# Altium PCB SmartEnergyMeter_PCB.PcbDoc
Units mm, origin at the board's own origin, x right, y up, seen from the top; angles counter-clockwise.
Board outline 92.25 x 74.75 mm, 2 copper layers (Top Layer, Bottom Layer); 31 components, 20 nets, 103 pads, 12 vias.
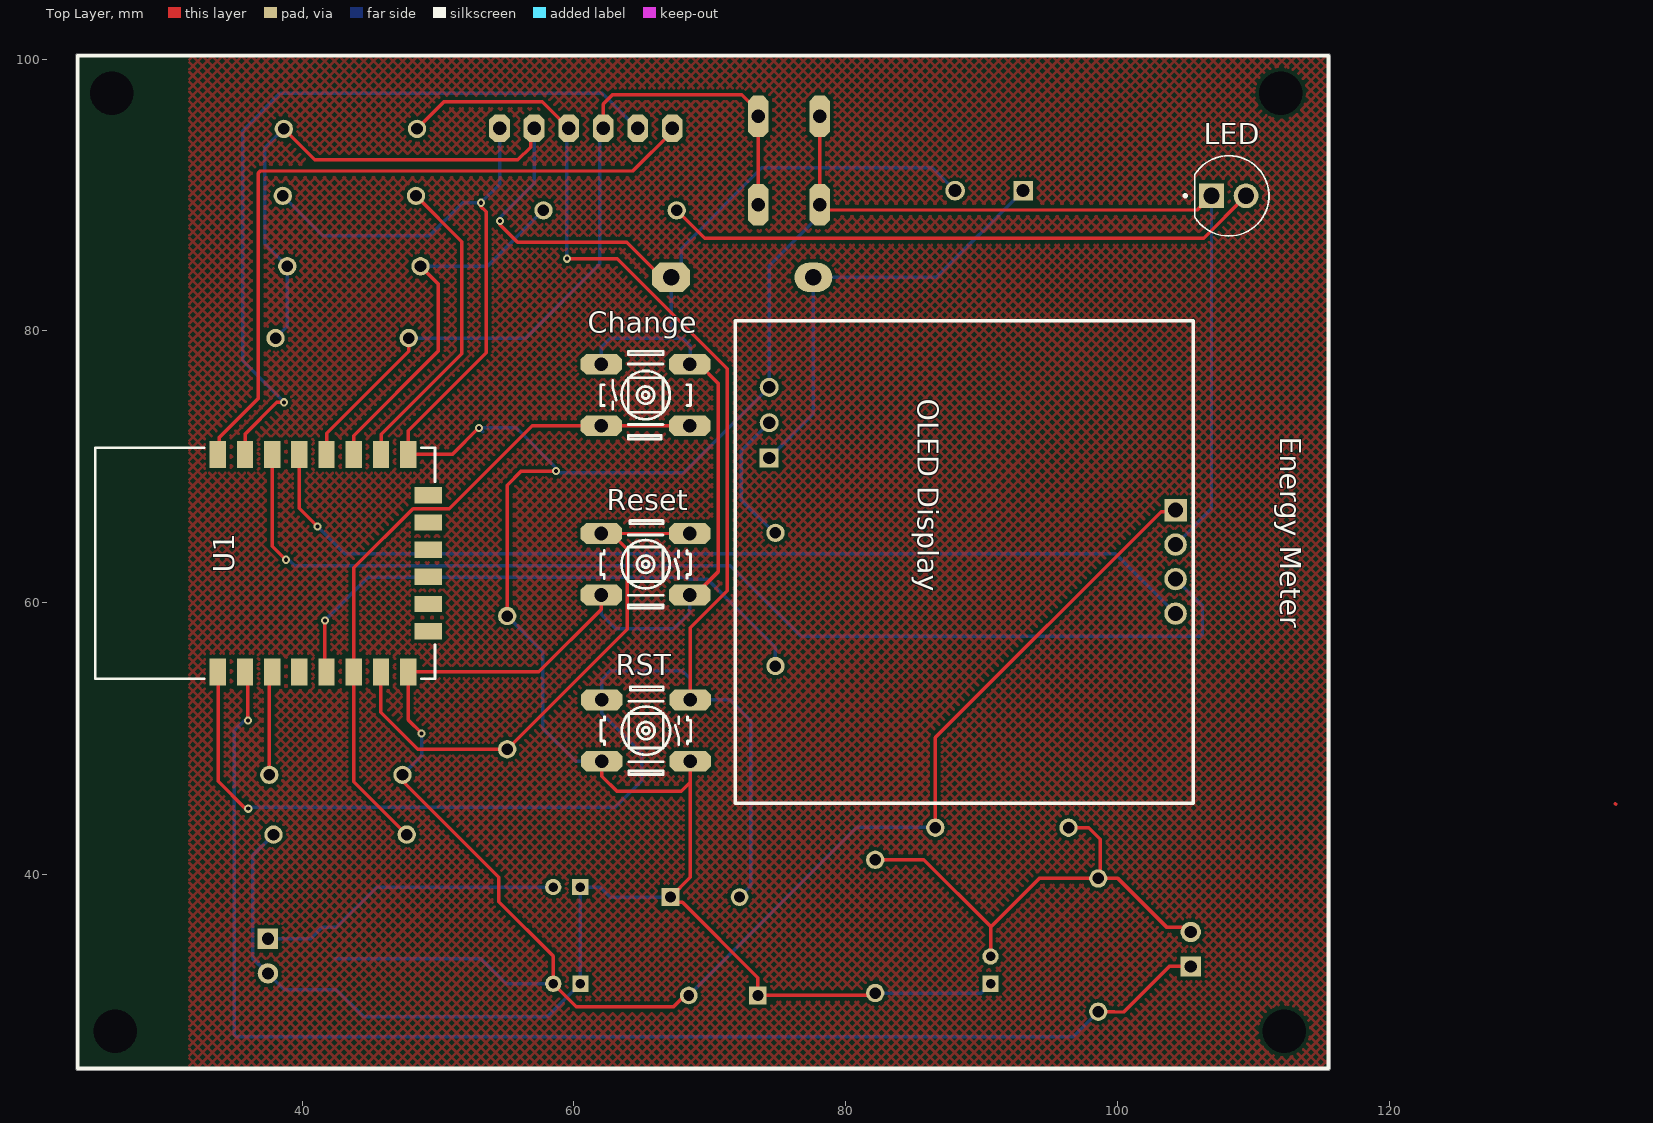
[diagram p0: Top Layer view]
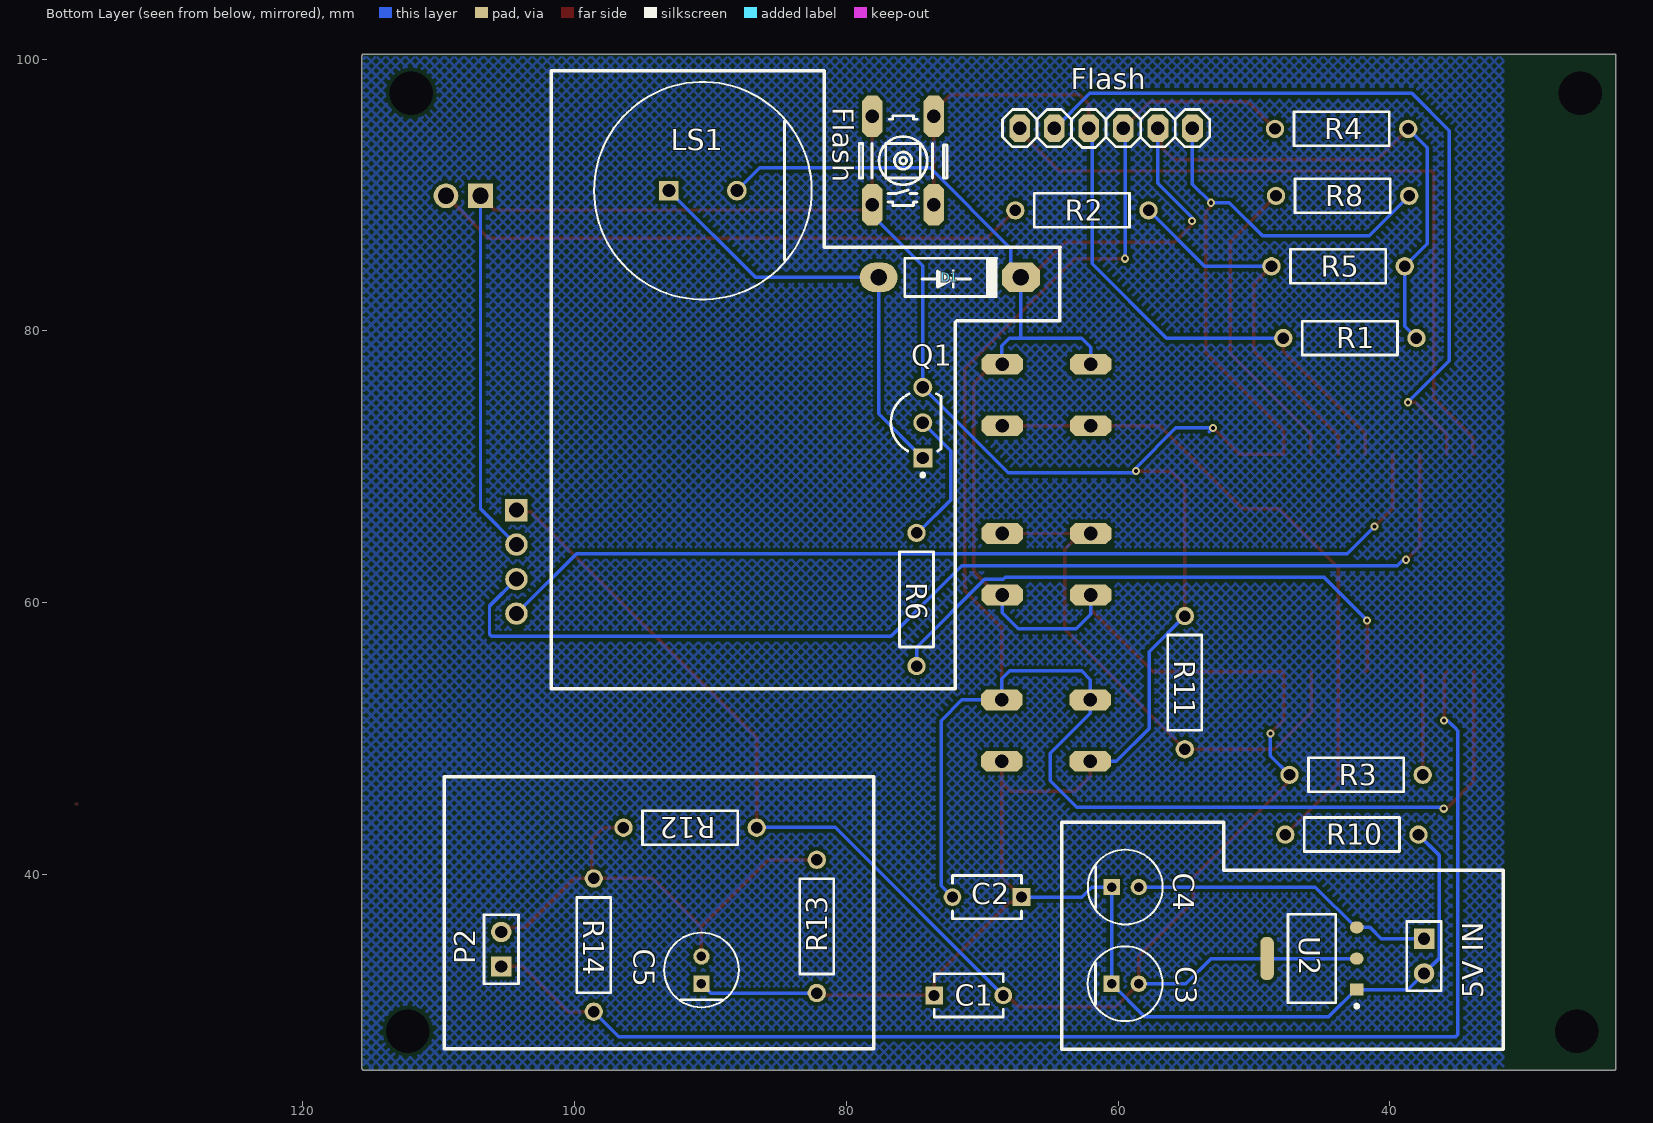
[diagram p1: Bottom Layer view, seen from below]
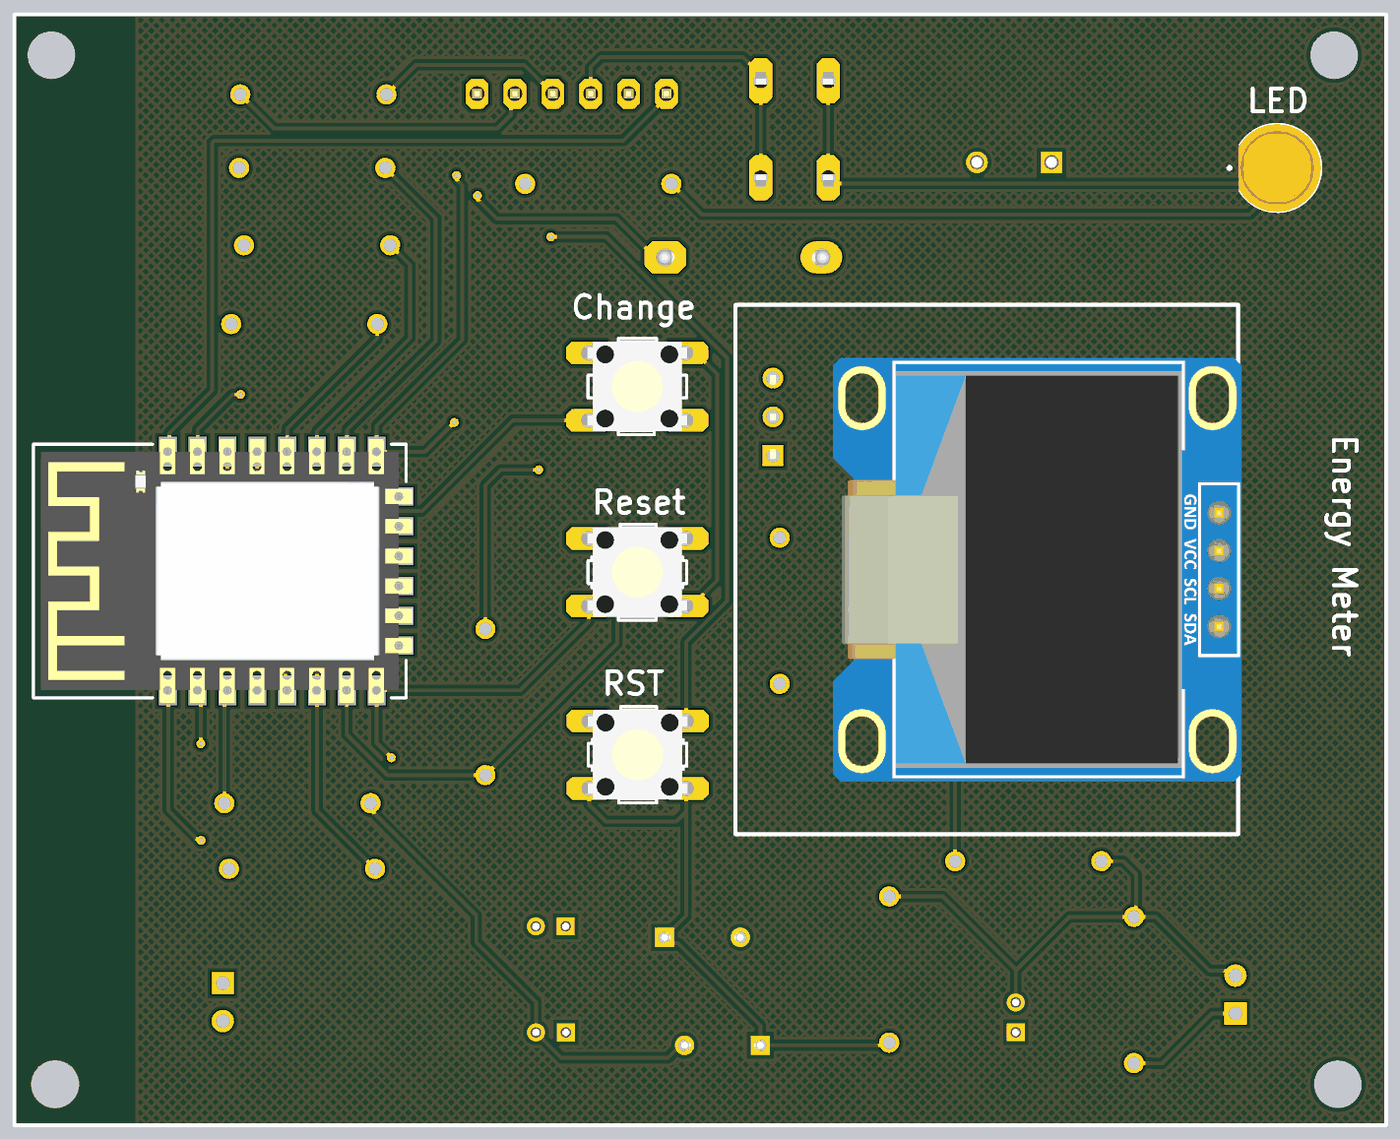
[diagram p2: 3D render of the assembled board from above, using the file's embedded part models]

## Layer stack, top to bottom
Top Solder: solder mask 0.0102, Solder Resist, Dk 3.5
Top Layer: signal copper 0.0356
Dielectric 1: dielectric 0.32, FR-4, Dk 4.8
Bottom Layer: signal copper 0.0356
Bottom Solder: solder mask 0.0102, Solder Resist, Dk 3.5

## Board outline
23.373,25.75 23.373,100.25 cw(c23.5,100.25) 23.5,100.377 115.5,100.377 cw(c115.5,100.25) 115.627,100.25 115.627,60.501 cw(c115.382,60.499) 115.627,60.5 cw(c115.5,60.5) 115.627,60.499 115.627,35 115.627,25.75 cw(c115.5,25.75) 115.5,25.623 23.5,25.623 cw(c23.5,25.75)

## Design rules (kind name [scope] priority, off if disabled: settings)
Clearance [All] p1: gap=0.254 ignorepadtopadclearanceinfootprint=FALSE except(0: Arc-Hole Track-Hole SMDPad-Hole THPad-Hole Via-Hole Fill-Hole Poly-Hole Region-Hole Text-Hole)
Height [All] p1: minheight=0 maxheight=30 prefheight=12.7
HoleSize [All] p1: absolutevalues=TRUE maxlimit=6.3 minlimit=0.3 maxpercent=80.000 minpercent=20.000
HoleToHoleClearance [All] p1: gap=0.5 allowstackedmicrovias=TRUE
MinimumAnnularRing [All] p1: minimumring=0.13
MinimumSolderMaskSliver [All] p1: minsoldermaskwidth=0.2
PolygonConnect [All] p1: connectstyle=Relief reliefconductorwidth=0.254 reliefentries=4 polygonreliefangle="90 Angle" airgapwidth=0.254
RoutingVias [All] p1: holewidth=0.711 width=1.27 viastyle="Through Hole" minholewidth=0.711 minwidth=1.27 maxholewidth=0.711 maxwidth=1.27
SolderMaskExpansion [All] p1: expansion=0.102 istentingtop=FALSE
Width [All] p1: maxlimit=0.254 minlimit=0.254 preferedwidth=0.254
26 further rules are at their usual default settings.

## Classes and differential pairs
component class SmartEnergyMeter: "5V IN" C1 C2 C3 C5 Change D1 Flash LED LS1 "OLED Display" P2 Q1 R2 R3 R4 R5 R6 R8 R10 R11 R12 R13 R14 Reset RESET RST U1 U2

## Components (designator, comment, footprint, x,y, rotation, side; value= is the part's Value field where it differs from the comment)
"5V IN" "Header 3" HDR1X2 37.49,35.281 r270 bottom
C1 "100nF" FP-C322C104K5R5TA-MFG 70.993,31.115 r180 bottom
C2 "100nF" FP-C322C104K5R5TA-MFG 69.647,38.354 r0 bottom
C3 "10uF" FP-RAD-TH-D_5_0_5-L_11_1-MFG 59.487,31.979 r180 bottom
C4 "10uF" FP-RAD-TH-D_5_0_5-L_11_1-MFG 59.477,39.091 r180 bottom
C5 "10uF" FP-RAD-TH-D_5_0_5-L_11_1-MFG 90.653,32.985 r90 bottom
Change "Tac switch" MY_TACTILE-PTH 65.278,75.286 r0 top
D1 "1N4007" My_DO41 72.415,83.845 r0 bottom
Flash "Header 6" My_1X06 60.884,94.92 r180 bottom (schematic designator P1)
Flash "Tac switch" MY_TACTILE-PTH 75.819,92.532 r90 bottom
LED "L08R5000Q1" LEDRD254W57D500H1070 108.179,89.941 r0 top
LS1 "SDC1610M5-01" FP-SDC1610M5-01-MFG 90.551,90.322 r180 bottom
"OLED Display" "OLED Display" PCBComponent_1 104.267,59.207 r90 top locked
P2 "Sensor" HDR1X2 105.385,33.249 r90 bottom
Q1 "BC546BRL1G" ONSC-TO-92-3-29-11_AM_BL 74.372,73.254 r90 bottom
R1 "10K" OMTE-RES7X2.5-2 42.951,79.477 r0 bottom
R2 "0.33K" OMTE-RES7X2.5-2 62.662,88.875 r0 bottom
R3 "10K" OMTE-RES7X2.5-2 42.494,47.346 r180 bottom
R4 "10K" OMTE-RES7X2.5-2 43.561,94.869 r0 bottom
R5 "10K" OMTE-RES7X2.5-2 43.815,84.76 r180 bottom
R6 "0.33K" OMTE-RES7X2.5-2 74.828,60.249 r90 bottom
R8 "10K" OMTE-RES7X2.5-2 43.485,89.941 r180 bottom
R10 "10K" OMTE-RES7X2.5-2 42.801,42.951 r180 bottom
R11 "10K" OMTE-RES7X2.5-2 55.093,54.13 r90 bottom
R12 "10K" OMTE-RES7X2.5-2 91.491,43.459 r180 bottom
R13 "10K" OMTE-RES7X2.5-2 82.169,36.195 r90 bottom
R14 "33E" OMTE-RES7X2.5-2 98.577,34.823 r90 bottom
Reset "Tac switch" MY_TACTILE-PTH 65.278,62.84 r180 top locked
RST "Tac switch" MY_TACTILE-PTH 65.303,50.597 r180 top locked
U1 "ESP-12F" ESP-12F 37.287,62.916 r90 top
U2 "AMS1117-3.3" FP-AMS1117-IPC_C 45.745,33.833 r0 bottom

## Footprints (in the part's own frame and the unit in brackets; to place one, negate y for a bottom-side part, rotate by r counter-clockwise, add the part's x,y. Pads: shape width x height; smd on the part's side, far side on the other; paste and mask are expansions set on the pad)
ESP-12F [mm]
  rect 2x1.2 smd: 1(-8,3.48) 2(-8,1.48) 3(-8,-0.52) 4(-8,-2.52) 5(-8,-4.52) 6(-8,-6.52) 7(-8,-8.52) 8(-8,-10.52) 15(8,-10.52) 16(8,-8.52) 17(8,-6.52) 18(8,-4.52) 19(8,-2.52) 20(8,-0.52) 21(8,1.48) 22(8,3.48)
  rect 1.2x2 smd: 9(-5,-12) 10(-3,-12) 11(-1,-12) 12(1,-12) 13(3,-12) 14(5,-12)
  silkscreen extent -8.5,-12.5 8.5,12.5, body extent -8.85,-12.9 8.85,12, height 3.1
FP-AMS1117-IPC_C [mm]
  rect 1.004x0.872 smd paste+0 mask+0: 1(-3.295,2.29)
  rrect100% 1.004x0.872 smd paste+0 mask+0: 2(-3.295,0) 3(-3.295,-2.29)
  rrect87% 1.004x3.182 smd paste+0 mask+0: 4(3.295,0)
  silkscreen extent -3.42,-3.25 1.75,3.62, body extent -3.53,-3.25 3.53,3.25, height 1.8
FP-C322C104K5R5TA-MFG [mm]
  rect 1.3x1.3 hole 0.8 paste-1000 mask+0: 1(-2.54,0)
  round 1.3 hole 0.8 paste-1000 mask+0: 2(2.54,0)
  silkscreen extent -2.54,-1.59 2.54,1.59, body extent -2.79,-1.59 2.79,1.59, height 6.6
FP-RAD-TH-D_5_0_5-L_11_1-MFG [mm]
  rect 1.2x1.2 hole 0.7 paste-1000 mask+0: 1(-1,0)
  round 1.2 hole 0.7 paste-1000 mask+0: 2(1,0)
  silkscreen extent -2.75,-2.75 2.75,2.75, body extent -2.5,-2.51 2.5,2.5, height 12
FP-SDC1610M5-01-MFG [mm]
  rect 1.45x1.45 hole 0.95 paste-1000 mask+0: 1(-2.5,0)
  round 1.45 hole 0.95 paste-1000 mask+0: 2(2.5,0)
  silkscreen extent -8,-8 8,8, body extent -8,-8 8,8, height 10
HDR1X2 [mm] "Connector; Header; 2 Position"
  rect 1.5x1.5 hole 0.9: 1(0,0)
  round 1.5 hole 0.9: 2(2.54,0)
  silkscreen extent -1.27,-1.27 3.81,1.27
LEDRD254W57D500H1070 [mm]
  round 1.815 hole 1.21: A(1.27,0)
  rect 1.815x1.815 / inner round 1.815 / far side rect 1.815x1.815 hole 1.21: C(-1.27,0)
  silkscreen extent -3.3,-2.96 2.96,2.96, body extent -2.6,-2.95 2.95,2.95, height 9.1
My_1X06 [mil]
  oct 60x80 hole 39.37: 1(-250,0) 2(-150,0) 3(-50,0) 4(50,0) 5(150,0) 6(250,0)
  silkscreen extent -300,-56 300,54, body extent -300,-49 296,49, height 323
My_DO41 [mil]
  oval 110x85 hole 47.24: A(204.71,-4)
  oct 110x85 hole 47.24: K(-207.1,-4)
  silkscreen extent -139,-59 129,51, body extent -228,-53 228,45, height 104
MY_TACTILE-PTH [mil]
  oct 120x60 hole 39.37: 1(-128,89) 1(128,89) 2(-128,-89) 2(128,-89)
  silkscreen extent -130,-127 130,127, body extent -152,-118 152,118, height 197
OMTE-RES7X2.5-2 [mm] "Resistor, Axial; Body 7x2.5mm, Lead Dia. 0.6mm"
  round 1.35 hole 0.85: 1(-4.9,0) 2(4.9,0)
  silkscreen extent -3.5,-1.25 3.5,1.25, body extent -3.5,-1.25 3.5,1.25, height 2.5
ONSC-TO-92-3-29-11_AM_BL [mm] "TO, 3-Leads, Body Dia 4.7mm, Pitch 2.6mm"
  rect 1.4x1.4 hole 0.9: 1(-2.6,0)
  round 1.4 hole 0.9: 2(0,0) 3(2.6,0)
  silkscreen extent -3.97,-1.34 2.13,2.35, body extent -2.84,-1.34 2.84,2.35, height 5.33
PCBComponent_1 [mm]
  round 1.65 hole 1.1: GND(5.08,0) SCK(2.54,0) SDA(0,0)
  rect 1.65x1.65 hole 1.1: VCC(7.62,0)
  Top Layer lines w0.254: -13.975,-32.35 -14.025,-32.4
  silkscreen extent -13.94,-1.3 21.56,32.4, body extent -10.4,-1.53 18,25.88, height 5.5

## Part data
"5V IN" P2: library part "Header 2", "Header, 2-Pin", LatestRevisionDate=17-Jul-2002, LatestRevisionNote="Re-released for DXP Platform.", Publisher="Altium Limited"
C1 C2: library part CMP-03020-034661-1, "CAP CER 0.1UF 50V X7R RADIAL", Case/Package=Radial, Dielectric=X7R, Dielectric Material=Ceramic, Max Operating Temperature=125°C, Min Operating Temperature=-55°C, Package Quantity=500, Tolerance=10%, Voltage=50V, Capacitance=100nF, Construction=RADIAL, Depth=3.18mm, Dissipation Factor=2.5%, Height=3.18mm, Height - Seated (Max)=0.26inch, Lead Diameter=0.51mm, Lead Free="Lead Free", Lead Length=7mm, Lead Pitch=5.08mm, Lead/Base Style="Formed Leads", Length=5.08mm, Material=Ceramic, Mount="Through Hole", Number of Pins=2, Packaging=Bulk, Radiation Hardening=No, REACH SVHC="No SVHC", RoHS Compliant=Yes, Series="Golden Max™", Termination=Radial, Voltage Rating=50V, Voltage Rating (DC)=50V, Weight=0.0625lb, Width=0.125inch
C3 C4 C5: library part CMP-05427-000260-1, "Aluminum Electrolytic Capacitors (Radial Lead Type) AEC-Q200 Qualified 10uF ±20% 50V", Case/Package=Radial, Leakage Current=3uA, Max Operating Temperature=105°C, Min Operating Temperature=-55°C, Package Quantity=2000, Ripple Current=39mA, Tolerance=20%, Voltage Rating=50V, Capacitance=10uF, Construction=RADIAL, Contact Plating=Tin, Diameter=5mm, Height=11mm, Height - Seated (Max)=0.472inch, Lead Diameter=0.5mm, Lead Free="Lead Free", Lead Pitch=2.5mm, Lead/Base Style=Straight, Length=11mm, Life (Hours)=1000Hour, Mount="Through Hole", Packaging="Ammo Pack", Polarity=Polar, Radiation Hardening=No, RoHS Compliant=Yes, Series=NHG, Termination=Radial, Voltage Rating (DC)=50V
Change Flash Reset RST: "small tac switch", ASiD Part Number="Tac switch-AS"
D1: "1 Amp Diode", ASiD Part Number=1n4007-AS
Flash: "Header, 6-Pin", ASiD Part Number="Header 6-AS"
LED: "LED, 5MM, ORANGE; LED / Lamp Size: 5mm / T-1 3/4; LED Colour: Orange; Typ Luminous Intensity: 4.3mcd; Viewing Angle: ...", Package=None, Availability="In Stock", Check_prices=https://www.snapeda.com/parts/L08R5000Q1/LED+Technology/view-part/?ref=eda, MF="LED Technology", MP=L08R5000Q1, Price=None, SnapEDA_Link=https://www.snapeda.com/parts/L08R5000Q1/LED+Technology/view-part/?ref=snap
LS1: library part CMP-08413-000008-1, "AUDIO MAGNETIC INDICATOR 4-8V TH", Frequency=2.4kHz, Max Operating Temperature=70°C, Max Supply Current=30mA, Min Operating Temperature=-10°C, Nominal Supply Voltage (DC)=5V, Diameter=16mm, Height=10mm, Input Type=DC, Lead Free="Lead Free", Mount="Through Hole", Number of Pins=2, Number of Terminals/Pins=2, Operating Supply Current=30mA, Packaging=Tray, Sensing Method=Magnetic, Series=SDC, Termination="PC Pins", Voltage Rating=5V
Q1: library part CMP-1048-01580-1, "Amplifier Transistor, NPN Silicon, 3-Pin TO-92, Pb-Free, Tape and Reel", Manufacturer="On Semiconductor", ComponentLink1Description="Manufacturer URL", ComponentLink1URL=http://www.onsemi.com/, ComponentLink2Description=Datasheet, ComponentLink2URL=http://www.onsemi.com/pub_link/Collateral/BC546-D.PDF, ComponentLink3Description="Package Specification", ComponentLink3URL=http://www.onsemi.com/pub_link/Collateral/MAC97-D.PDF, DatasheetVersion="Rev. 7", fT Min (MHz)=150, IC Continuous (A)=0.1, Mounting Technology="Through Hole", PackageDescription="3-Pin Transistor Outline, Body 4.825 x 3.685 mm, Pitch 1.27 mm", PackageReference=TO-92-3-29-11_AM_BL, PackageVersion="Rev. AM", Packing="Tape and Reel", PartNumber=BC546BRL1G, Polarity=NPN, RoHS=TRUE
R1 R2 R3 R4 R5 R6 R8 R10 R11 R12 R13 R14: library part CMP-2000-06865-1, "Little Demon(R) Carbon Composition Molded OD Series, 250 V, 10 KOhm, +/-5%, -70 to 130 degC, 2-Pin THD, RoHS, Bulk", Manufacturer=Ohmite, Operating Temperature=-, Package / Case=Axial, Package Description="2-Pin THD Resistor, Body 7 x 2.5 mm, Lead Dia. 0.6 mm", Package Reference=RES7X2.5, PartNumber=OD103JE, Power (Watts)=0.25W,1/4W, Power Rating=0.25W, Resistance (Ohms)=10k, Standard Package=100, Tolerance=±5%, Catalog Drawings=OD,OF,OASeries, Category=Resistors, Composition=CarbonComposition, Datasheet URL=http://www.ohmite.com/cat/res_od_of_oa.pdf, Datasheet Version=06/2016, EDA / CAD Models=DownloadfromAcceleratedDesigns, Family=ThroughHoleResistors, Features=PulseWithstanding, Height=-, Manufacturer URL=http://www.ohmite.com/, Mounting Technology=ThroughHole, Number of Terminations=2, Online Catalog=OD,OF,OASeries,LittleDemon®, Packaging=Bulk, RoHS Information="LittleDemon\"E\"SeriesMaterialDeclaration", Series=LittleDemon®OD, Size / Dimension="0.098\"Diax0.276\"L(2.50mmx7.00mm)", Supplier Device Package=Axial, Temperature Coefficient=-
U1: "WiFi Module", Package=Package, Availability="No availability data", Check_prices=https://www.snapeda.com/parts/ESP-12F/AI-Thinker/view-part/6648243/?ref=eda, MF=AI-Thinker, MP=ESP-12F, Price=None, SnapEDA_Link=https://www.snapeda.com/parts/ESP-12F/AI-Thinker/view-part/6648243/?ref=snap
U2: library part CMP-209535-000001-1, "LDO Voltage Regulators 1A, 3.3V", Dropout Voltage=1.1V, Manufacturer="Advanced Monolithic Systems", Max Junction Temp=+125°C, Max Power Dissipation=1.2W, Max Supply Voltage=15V, Nominal Supply Current=5mA, Output Current=1A, Output Voltage=3.3V, Package=AMS1117, Temperature="-40°C to +125°C", Temperature Range Low=-40°C, Automotive=No, Category=IC, ComponentLink2Description=Datasheet, ComponentLink2URL=http://www.advanced-monolithic.com/pdf/ds1117.pdf, Device Class L1="Integrated Circuits (ICs)", Device Class L2="Power Management ICs", Device Class L3="Voltage Regulators - Linear", Height=1.8mm, Ipc Land Pattern Name=SOT229P700X180-4, Lead Free=Yes, Manufacturer Part Number=AMS1117-3.3, Number Of Outputs=1, Octopart=https://octopart.com/ams1117-3.3-advanced+monolithic+systems-25899300, Output Type=Fixed, RoHS=TRUE, Standoff Height=0.64mm, Temperature Range High=+125°C

## Free pads (board coordinates)
  round 1.524 hole 3.2 unplated: 2(26,97.5) 4(112,97.5) 5(112.25,28.5)
  round 1.524 hole 3.2: 3(26.25,28.5)

## Via types
v1: diameter 0.6, hole 0.3, Top Layer to Bottom Layer, 12 vias

## Nets (pads, with @x,y where several pads share a name; then routed paths per layer and width w, separated by ;. In a path a pad name is that pad's centre, name@x,y a point inside that pad or via, vN(x,y) a via of type N, cw(c..) or ccw(c..) an arc to the next point about the centre after c; other vN are vias at no path point)
+3.3: "OLED Display.VCC" C1.2 C3.2 Change.1 D1.K Flash.5 LS1.2 R1.1 R3.1 R4.1 R5.2 R12.2 Reset.1 U1.8 U2.2 U2.4 | length 257.8
  Top Layer w0.254: R4.1 40.947,92.583 55.884,92.583 56.82,93.519 56.82,94.666 Flash.5 ; R3.1 47.604,47.136 47.604,46.706 54.483,39.827 54.483,38.024 58.487,34.02 C3.2 60.189,30.277 67.332,30.277 68.17,31.115 C1.2 ; v1(48.793,50.394) 47.807,51.38 U1.8 57.43,54.916 62.027,59.512 Reset.1@62.027,60.579 ; v1(54.559,88.087) 54.559,87.833 55.855,86.538 63.887,86.538 66.477,83.947 D1.K ; Reset.1@68.529,60.579 68.91,60.579 70.637,62.306 70.637,76.124 69.215,77.546 Change.1@68.529,77.546 ; R12.2 86.591,50.091 103.21,66.71 104.15,66.71 104.267,66.827
  Bottom Layer w0.254: R1.1 38.915,80.34 R5.2 37.262,86.413 37.262,93.47 R4.1 ; U2.2 U2.4 53.162,33.833 55.016,31.979 C3.2 ; R3.1 48.793,48.745 v1(48.793,50.394) ; v1(54.559,88.087) 54.559,88.341 57.074,90.856 Flash.5 ; Reset.1@62.027,60.579 62.027,59.157 63.094,58.09 67.335,58.09 68.529,59.284 Reset.1@68.529,60.579 ; Change.1@62.027,77.546 62.027,78.816 62.687,79.477 67.155,79.477 ; C1.2 80.823,43.485 86.565,43.485 R12.2 ; Change.1@68.529,77.546 68.555,77.572 68.555,78.918 67.996,79.477 67.155,79.477 ; LS1.2 86.375,91.999 73.832,91.999 67.885,86.052 67.885,84.677 D1.K 67.155,79.477
+5: "5V IN.1" C4.2 U2.3 | length 22.6
  Bottom Layer w0.254: 37.49,35.281 40.628,35.281 41.471,36.123 U2.3 42.516,36.123 45.484,39.091 C4.2
EN: R3.2 U1.3 | length 7.7
  Top Layer w0.254: R3.2 37.594,54.703 U1.3
GND: "5V IN.2" "OLED Display.GND" C1.1 C2.1 C3.1 C4.1 C5.1 Flash.1@78.08,89.281 Flash.1@78.08,95.783 Flash.6 LED.C Q1.3 R8.2 R10.2 R11.2 R13.1 RST.1 U1.15 U2.1 | length 279
  Top Layer w0.254: v1(53.01,72.873) 51.053,70.916 U1.15 47.807,72.674 53.543,78.41 53.543,88.777 53.162,89.158 v1(53.162,89.433) ; R11.2 55.093,68.656 56.134,69.698 v1(58.674,69.698) ; RST.1@62.052,48.336 62.052,47.244 63.17,46.126 67.894,46.126 68.555,46.787 ; RST.1@68.555,48.336 68.555,46.787 ; Flash.1@78.08,95.783 78.08,89.281 78.461,88.9 105.867,88.9 LED.C ; R13.1 81.989,31.115 C1.1 73.533,32.423 67.989,37.966 67.494,37.966 C2.1 68.555,39.802 68.555,46.787
  Bottom Layer w0.254: R10.2 36.359,41.41 36.359,33.872 37.49,32.741 38.688,31.543 U2.1 42.516,31.543 44.494,29.566 58.09,29.566 59.23,30.705 59.23,30.721 C3.1 60.477,31.988 C4.1 61.951,39.091 62.687,38.354 C2.1 ; R8.2 41.531,86.995 49.378,86.995 51.816,89.433 v1(53.162,89.433) 54.534,90.805 Flash.6 ; 53.289,72.593 v1(53.01,72.873) 55.753,72.873 58.674,69.952 v1(58.674,69.698) 58.801,69.571 68.089,69.571 Q1.3 74.372,84.812 78.08,88.519 Flash.1@78.08,89.281 ; R11.2 57.725,56.397 57.725,50.759 60.147,48.336 RST.1@62.052,48.336 ; R13.1 89.962,31.295 C5.1 ; 104.267,64.287 106.909,66.929 LED.C
GPIO0: Flash.2@73.558,89.281 Flash.2@73.558,95.783 Flash.3 R1.2 U1.18 | length 58.3
  Top Layer w0.254: U1.18 41.807,72.465 47.851,78.509 R1.2 ; Flash.3 62.154,96.698 62.84,97.384 72.339,97.384 73.558,96.164 73.558,95.783 Flash.2@73.558,89.281
  Bottom Layer w0.254: R1.2 56.439,79.477 61.898,84.935 61.898,94.664 Flash.3
GPIO2: R2.1 R5.1 U1.17 | length 27.7
  Top Layer w0.254: U1.17 43.807,72.306 50.038,78.537 50.038,83.437 R5.1
  Bottom Layer w0.254: R5.1 53.647,84.76 R2.1
GPIO12: Change.2 R10.1 U1.6 | length 50.3
  Top Layer w0.254: R10.1 43.807,46.845 U1.6 43.807,62.575 48.167,66.935 50.842,66.935 56.932,73.025 62.027,73.025 Change.2@68.529,73.025
GPIO13: R11.1 Reset.2 U1.7 | length 40.7
  Top Layer w0.254: U1.7 45.807,51.943 48.521,49.23 R11.1 63.932,58.069 63.932,63.957 62.789,65.1 62.027,65.1 Reset.2@68.529,65.1
GPIO14: R6.1 U1.5 | length 41.8
  Top Layer w0.254: v1(41.681,58.699) 41.681,55.042 U1.5
  Bottom Layer w0.254: v1(41.681,58.699) 44.882,61.9 68.277,61.9 68.455,61.722 69.83,61.722 74.828,56.724 R6.1
GPIO15: R8.1 U1.16 | length 22.9
  Top Layer w0.254: U1.16 45.822,70.93 45.822,72.39 51.765,78.334 51.765,86.561 R8.1
NetC5_2: C5.2 P2.2 R12.1 R13.2 R14.2 | length 36.2
  Top Layer w0.254: R13.2 85.753,41.095 90.653,36.195 90.653,36.144 ; C5.2 90.653,36.144 ; R12.1 97.866,43.459 98.73,42.596 98.73,39.876 R14.2 ; P2.2 105.047,35.789 104.718,36.118 103.632,36.118 100.027,39.723 R14.2 ; 90.653,36.144 94.232,39.723 R14.2
NetD1_A: D1.A LS1.1 Q1.1 | length 33.1
  Top Layer w0.254: LS1.1 LS1.1@93.337,90.036
  Bottom Layer w0.254: Q1.1 77.615,73.896 D1.A 86.676,83.947 LS1.1
NetLED_A: LED.A R2.2 | length 44
  Top Layer w0.254: R2.2 69.619,86.817 106.324,86.817 LED.A
NetQ1_2: Q1.2 R6.2 | length 10.1
  Bottom Layer w0.254: Q1.2 72.314,71.195 72.314,67.564 74.729,65.149 R6.2
RST: C2.2 Flash.4 R4.2 RST.2 U1.1 | length 139.7
  Top Layer w0.254: U1.1 33.833,54.89 33.833,46.863 35.839,44.856 v1(36.043,44.856) ; R4.2 50.442,96.85 57.683,96.85 Flash.4 ; v1(59.487,85.319) 63.201,85.319 71.298,77.221 71.298,60.904 68.555,58.161 RST.2@68.555,52.857
  Bottom Layer w0.254: v1(36.043,44.856) 36.144,44.958 63.043,44.958 64.999,46.914 64.999,48.92 62.056,51.863 62.056,52.854 62.052,52.857 62.052,54.356 62.687,54.991 67.97,54.991 68.555,54.407 68.555,52.857 71.501,52.857 73.025,51.333 73.025,39.192 C2.2 ; v1(59.487,85.319) 59.487,94.793 Flash.4
Rx: Flash.2@64.694,94.92 U1.21 | length 57.8
  Top Layer w0.254: U1.21 35.807,72.409 38.15,74.752 v1(38.684,74.752)
  Bottom Layer w0.254: v1(38.684,74.752) 35.636,77.8 35.636,94.742 38.379,97.485 62.078,97.485 64.643,94.92 Flash.2@64.694,94.92
SCL: "OLED Display.SCK" U1.20 | length 82.9
  Top Layer w0.254: U1.20 37.807,64.174 v1(38.811,63.17)
  Bottom Layer w0.254: v1(38.811,63.17) 39.036,63.17 39.468,62.738 71.501,62.738 76.708,57.531 106.099,57.531 106.248,57.68 106.248,59.766 104.267,61.747
SDA: "OLED Display.SDA" U1.19 | length 71.6
  Top Layer w0.254: U1.19 39.807,66.949 v1(41.148,65.608)
  Bottom Layer w0.254: v1(41.148,65.608) 43.129,63.627 99.847,63.627 104.267,59.207
SensorIn: P2.1 R14.1 U1.2 | length 99.9
  Top Layer w0.254: U1.2 36.017,54.706 v1(36.017,51.333) ; R14.1 99.76,29.923 99.784,29.899 100.461,29.899 103.81,33.249 P2.1
  Bottom Layer w0.254: v1(36.017,51.333) 35.742,51.333 35.253,50.844 35.249,50.844 35.001,50.597 35.001,28.241 35.15,28.092 96.746,28.092 R14.1
Tx: Flash.1@67.234,94.92 U1.22 | length 53.9
  Top Layer w0.254: U1.22 33.896,71.004 33.896,72.148 36.779,75.032 36.779,91.621 36.928,91.77 64.338,91.77 67.234,94.666 Flash.1@67.234,94.92
pads on no net: U1.4 U1.9 U1.10 U1.11 U1.12 U1.13 U1.14

## Polygon pours and split planes (outlines as drawn)
no net on Bottom Layer "NONET_L02_P000" (hatched 45Degree grid 0.508 track 0.203, pour order 0): 115.5,100.25 115.5,25.75 31.719,25.75 31.674,25.705 31.674,100.127 115.377,100.127
no net on Top Layer "NONET_L01_P001" (hatched 45Degree grid 0.508 track 0.203, pour order 1): 115.138,100.203 115.214,100.127 115.377,100.127 115.377,25.873 115.5,25.75 31.719,25.75 31.719,100.082 31.674,100.127 115.377,100.127 115.438,100.188

## Silkscreen, mask and mechanical layers (free items; w line width, h text height)
Top Overlay:
  lines w0.254: 23.5,25.75 112.25,25.75 115.5,25.75 115.5,28.625 115.5,31.75 115.5,35 115.5,100.25 23.5,100.25 23.5,25.75
  text "Energy Meter" at 111.963,72.212 h1.52 r270
Bottom Overlay:
  lines w0.254: 64.268,86.157 81.61,86.157 81.61,99.162 101.702,99.162 101.702,53.696 71.984,53.696 71.984,80.651 71.867,80.767 64.292,80.767 64.292,86.132 ; 77.978,47.117 77.978,27.203 108.89,27.203 109.576,27.203 109.576,44.323 109.576,47.193 77.978,47.193 ; 31.674,27.153 31.674,40.335 52.222,40.335 52.222,43.866 64.135,43.866 64.135,27.153 31.674,27.153